# Altium PCB LoRa.PcbDoc
Units mm, origin at the board's own origin, x right, y up, seen from the top; angles counter-clockwise.
Board outline 32.01 x 35.01 mm, 2 copper layers (Top Layer, Bottom Layer); 13 components, 28 nets, 67 pads, 15 vias.
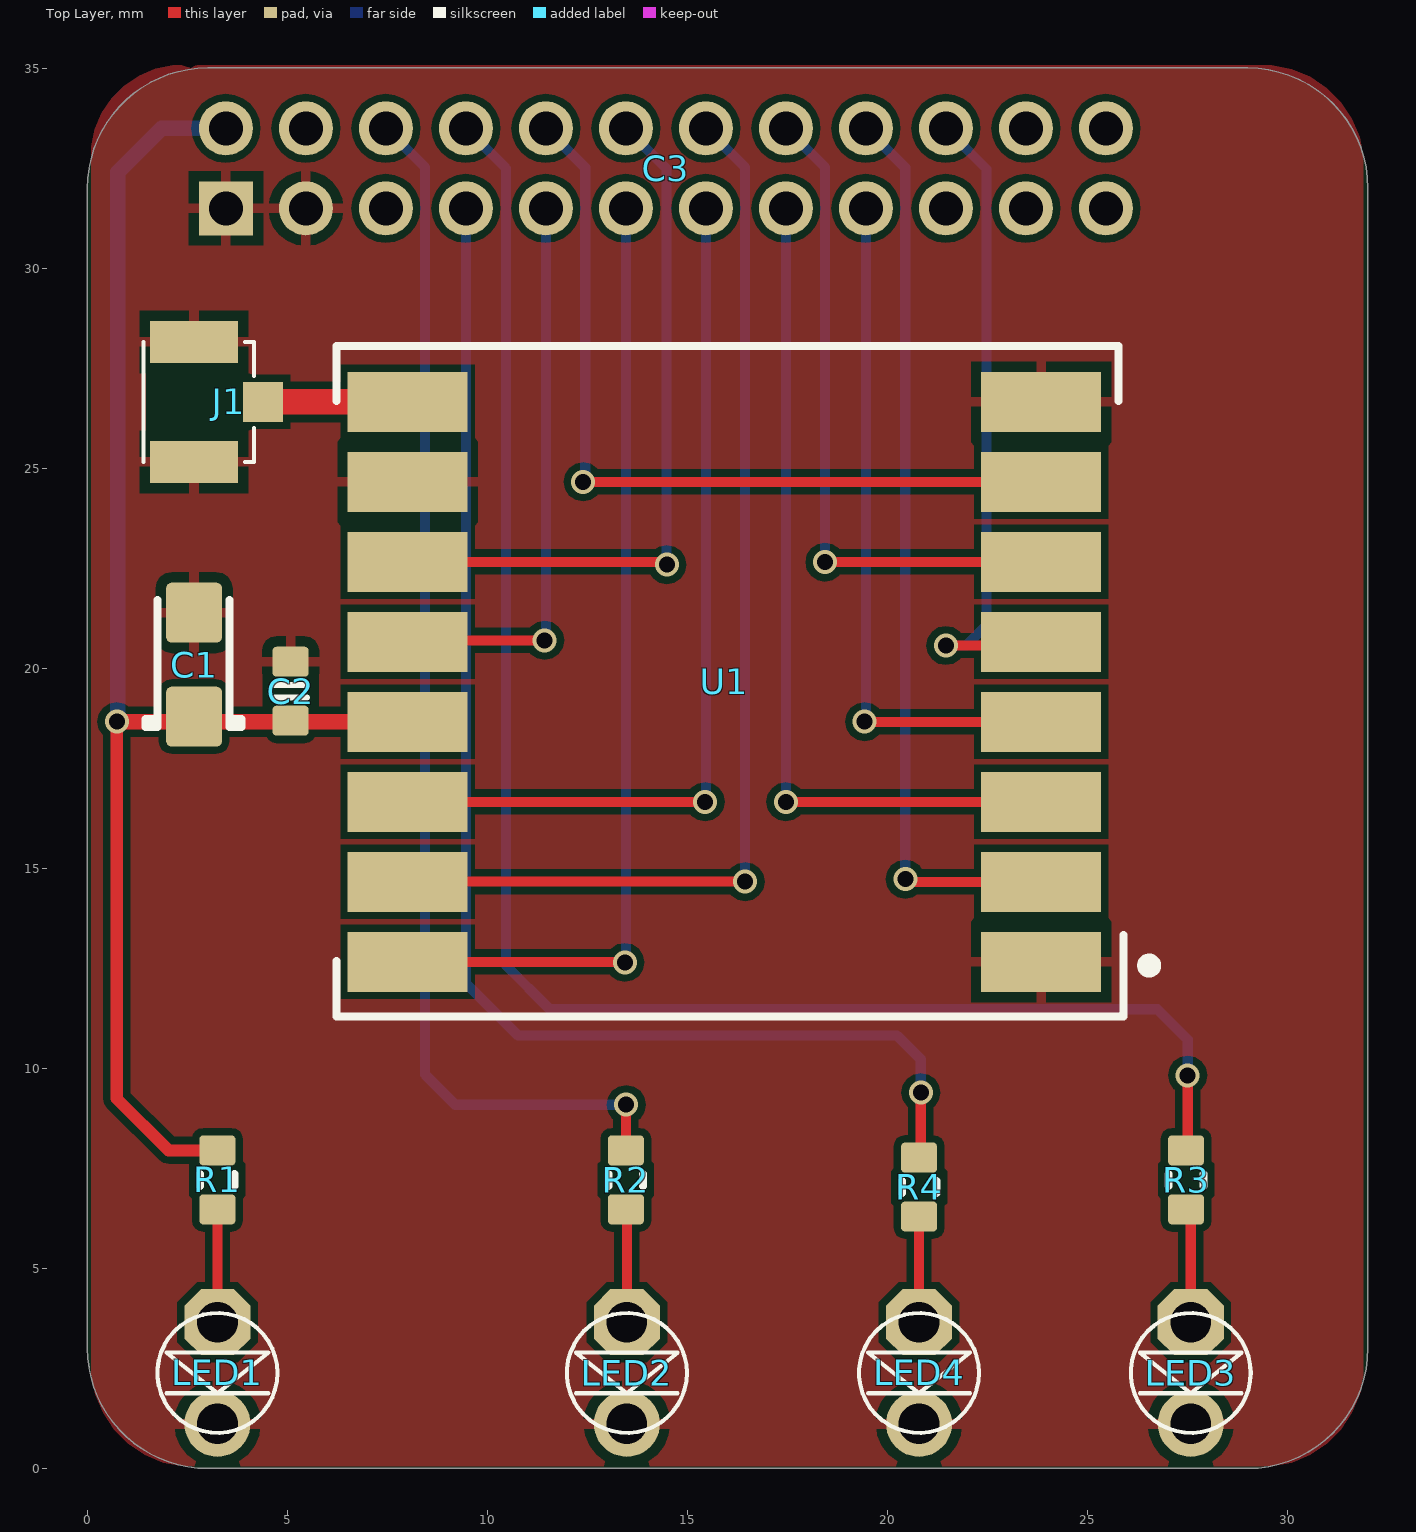
[diagram p0: Top Layer view]
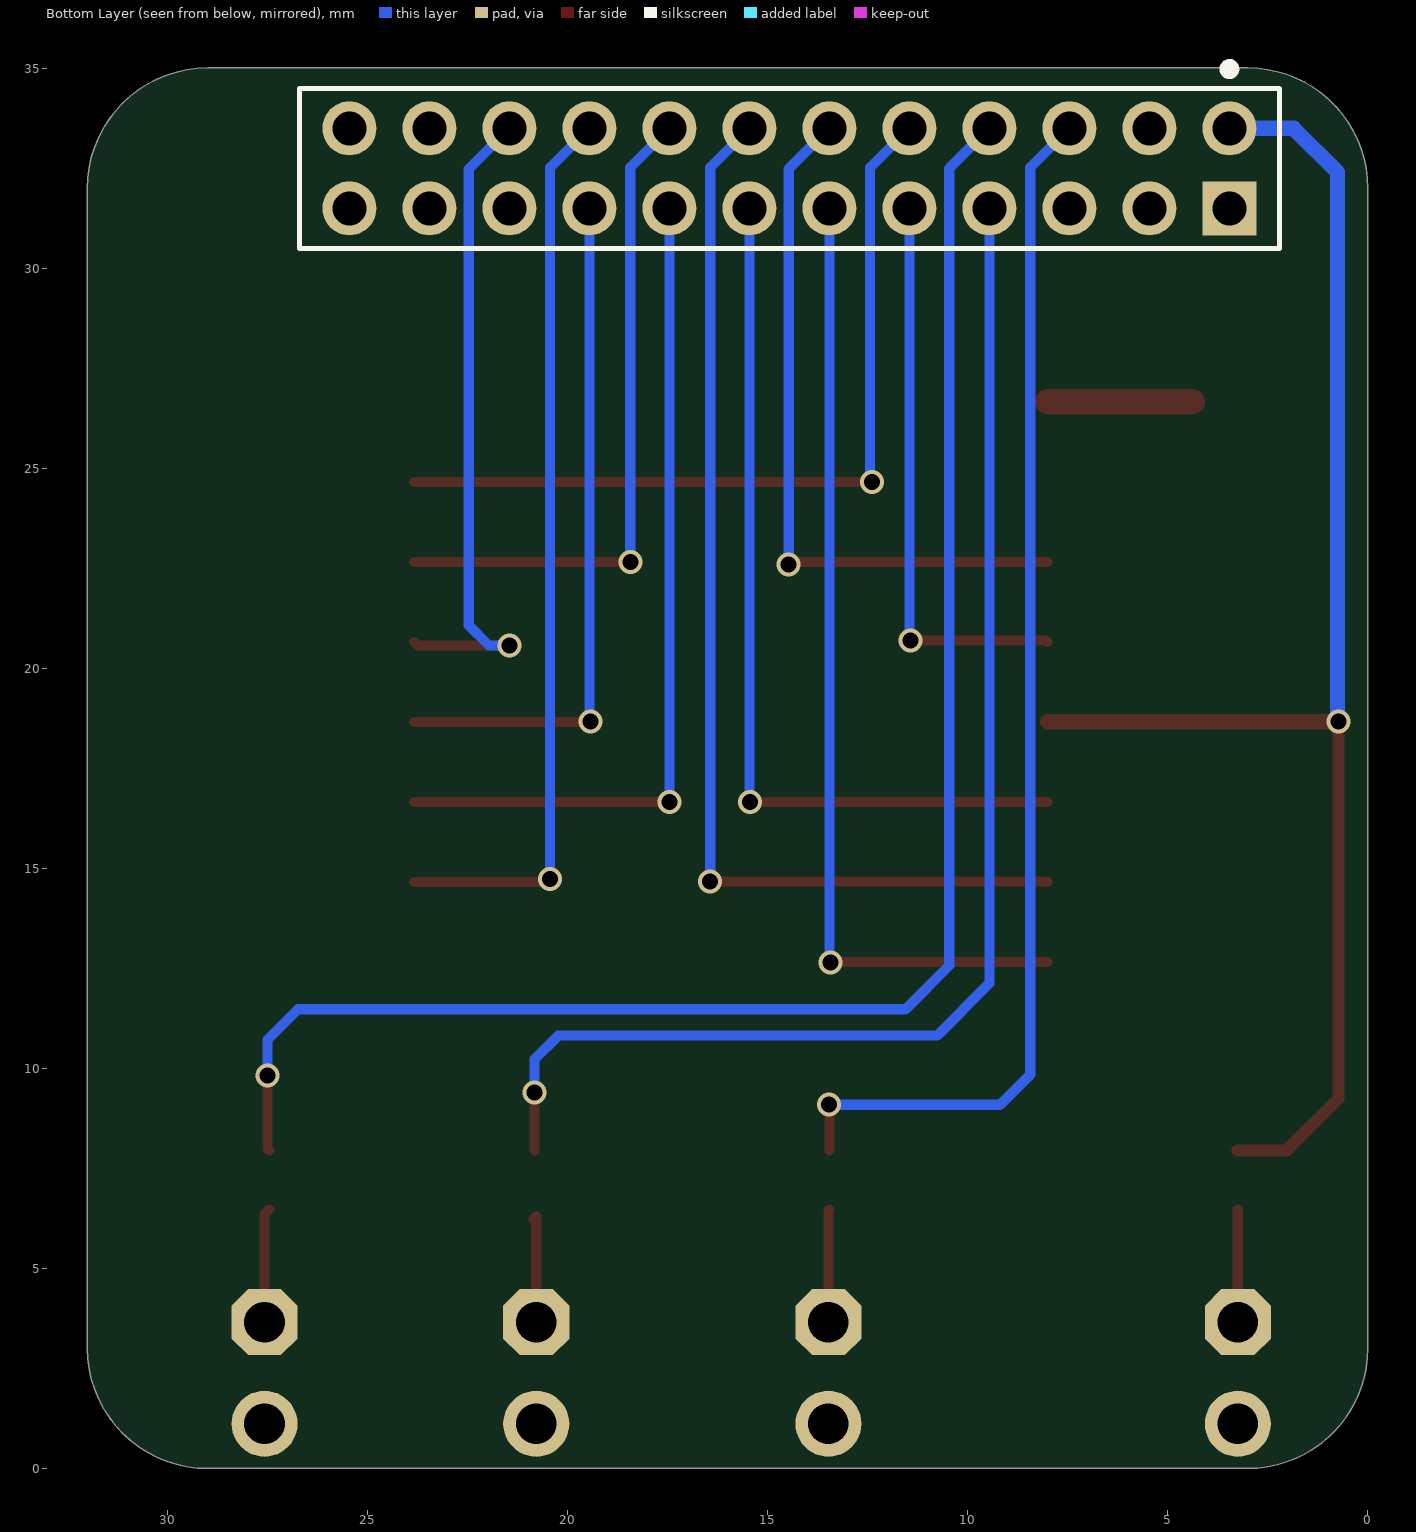
[diagram p1: Bottom Layer view, seen from below]
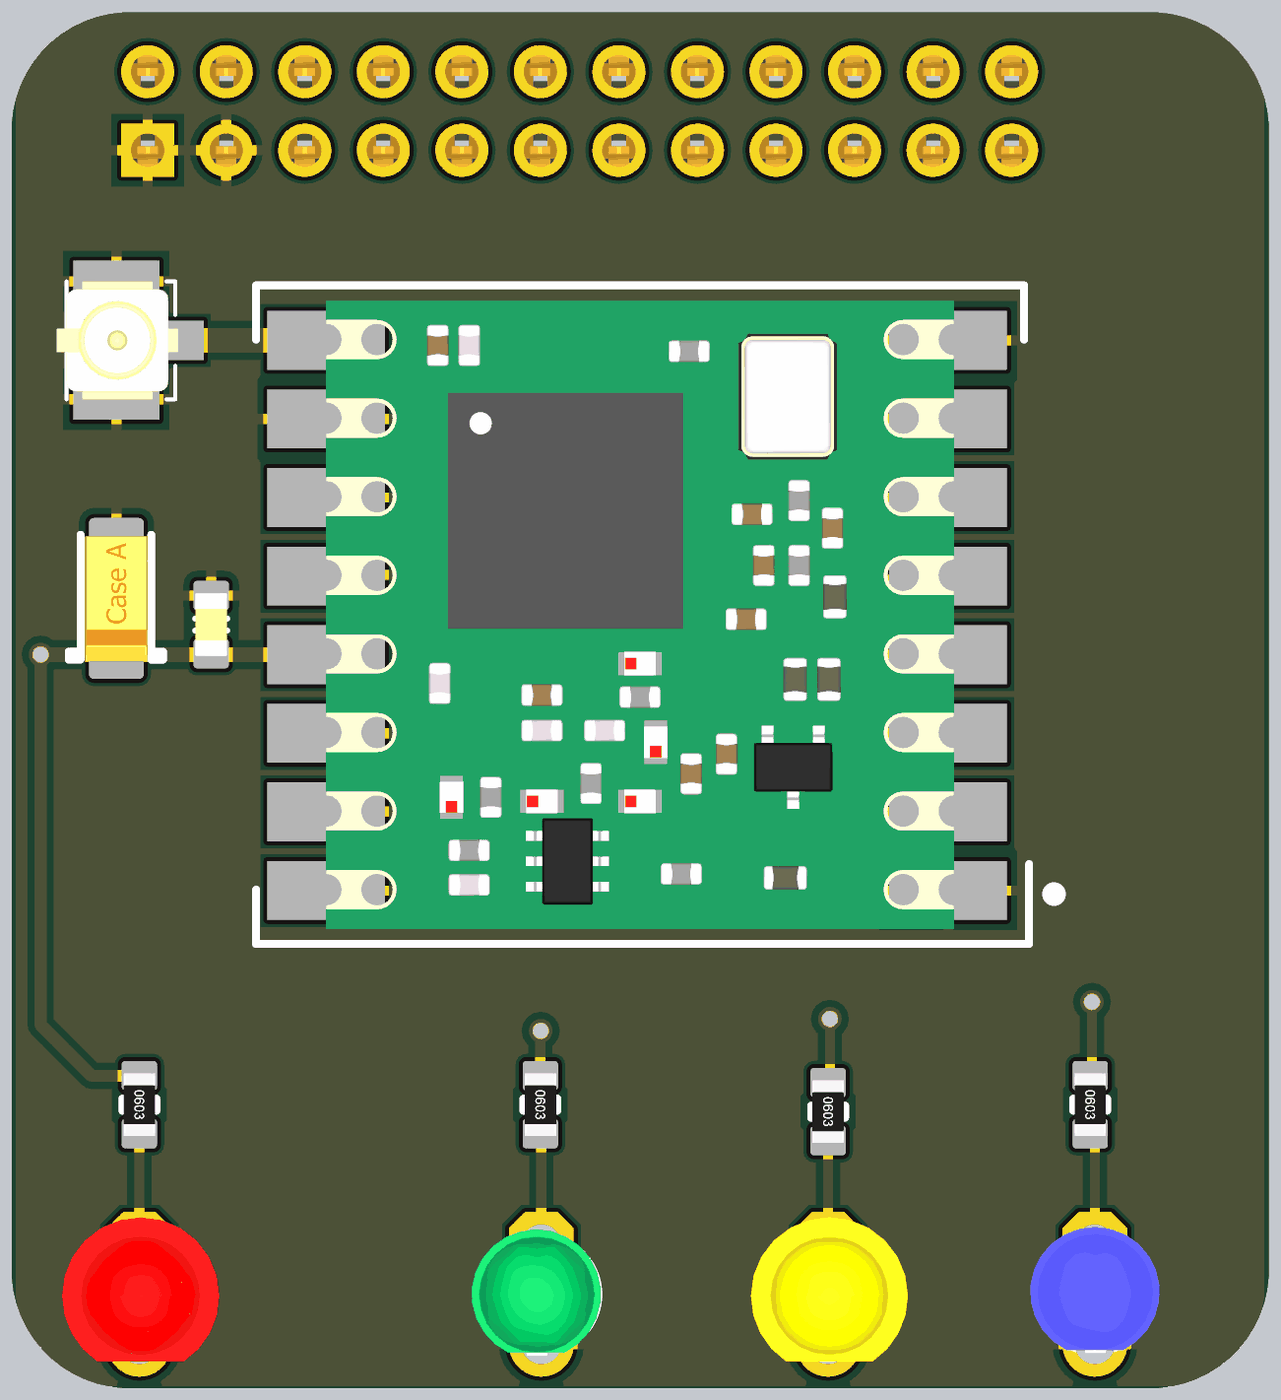
[diagram p2: 3D render of the assembled board from above, using the file's embedded part models]

## Layer stack, top to bottom
Top Solder: solder mask 0.0102, Solder Resist, Dk 3.5
Top Layer: signal copper 0.0356
Dielectric 1: dielectric 0.32, FR-4, Dk 4.8
Bottom Layer: signal copper 0.0356
Bottom Solder: solder mask 0.0102, Solder Resist, Dk 3.5

## Board outline
3.006,0 cw(c3.006,3.006) 0,3.006 0,32.006 cw(c3.006,32.006) 3.006,35.013 29.005,35.013 cw(c29.005,32.005) 32.013,32.006 cw(c32.006,32.005) 32.013,32.005 32.013,3.006 cw(c32.006,3.006) 32.013,3.006 ccw(c29.006,3.006) 32.013,3.006 cw(c29.006,3.006) 29.006,0

## Design rules (kind name [scope] priority, off if disabled: settings)
Clearance [All] p1: gap=0.178 ignorepadtopadclearanceinfootprint=FALSE
PolygonConnect [All] p1: connectstyle=Relief reliefconductorwidth=0.254 reliefentries=4 polygonreliefangle="90 Angle" airgapwidth=0.254
RoutingVias [All] p1: holewidth=0.4 width=0.6 viastyle="Through Hole" minholewidth=0.4 minwidth=0.6 maxholewidth=0.711 maxwidth=1.27
SolderMaskExpansion [All] p1: expansion=0.102
Width [All] p1: maxlimit=1.27 minlimit=0.254 preferedwidth=0.254
30 further rules are at their usual default settings.

## Components (designator, comment, footprint, x,y, rotation, side; value= is the part's Value field where it differs from the comment)
C1 "10uF" "CASE A" 2.667,18.796 r90 top
C2 "0.01uF" C_0603 5.08,19.431 r270 top
C3 "JP12x2-2.0" J12-C2T 14.463,32.504 r0 top
J1 "Anten" ANTEN_IPEX 4.394,26.665 r180 top
LED1 "LED" LED-3MM-RED 3.252,3.658 r270 top value="LED 3 ly Single Colour"
LED2 "LED" LED-3MM-GREEN 13.487,3.658 r270 top value="LED 3 ly Single Colour"
LED3 "LED" LED-3MM-BLUE 27.584,2.261 r270 top value="LED 3 ly Single Colour"
LED4 "LED" LED-3MM-YELLOW 20.791,3.658 r270 top value="LED 3 ly Single Colour"
R1 "4.7k" R_0603 3.252,7.214 r270 top
R2 "4.7k" R_0603 13.463,7.214 r270 top
R3 "4.7k" R_0603 27.466,7.214 r270 top
R4 "4.7k" R_0603 20.791,7.036 r270 top
U1 "RFM95" RFM95 16.002,19.685 r90 top

## Footprints (in the part's own frame and the unit in brackets; to place one, negate y for a bottom-side part, rotate by r counter-clockwise, add the part's x,y. Pads: shape width x height; smd on the part's side, far side on the other; paste and mask are expansions set on the pad)
ANTEN_IPEX [mm]
  rect 1x1 smd: 1(0,0)
  rect 2.2x1.05 smd: 2(1.727,1.5) 2(1.727,-1.5)
  Top Layer pour cut-out: 0.635,0.762 0.635,-0.762 2.921,-0.762 2.921,0.762
  silkscreen extent 0.23,-1.5 3,1.5, body extent 0.15,-1.5 3.25,1.5, height 1.25
C_0603 [mm]
  rrect25% 0.75x0.9 smd: 1(-0.737,0) 2(0.737,0)
  Top Layer pour cut-out: -0.6,0.5 -0.4,0.7 0.4,0.7 0.6,0.5 0.6,-0.5 0.4,-0.7 -0.4,-0.7 -0.6,-0.5
  silkscreen extent -0.15,-0.41 0.15,0.41, body extent -0.8,-0.41 0.8,0.41, height 0.81
"CASE A" [mm]
  rrect20% 1.5x1.4 smd: A(0,0) K(2.6,0)
  silkscreen extent -0.26,-1.19 2.92,1.21, body extent -0.3,-0.8 2.9,0.8, height 1.6
J12-C2T [mm] "24 pins, dual row, straight, gold plating"
  rect 1.35x1.35 hole 0.85: 1(-11,-1)
  round 1.35 hole 0.85: 2(-9,-1) 3(-7,-1) 4(-5,-1) 5(-3,-1) 6(-1,-1) 7(1,-1) 8(3,-1) 9(5,-1) 10(7,-1) 11(9,-1) 12(11,-1) 13(11,1) 14(9,1) 15(7,1) 16(5,1) 17(3,1) 18(1,1) 19(-1,1) 20(-3,1) 21(-5,1) 22(-7,1) 23(-9,1) 24(-11,1)
  body extent -12.25,-2 12.25,2, height 4.31
LED-3MM-BLUE [mil]
  oct 65x65 hole 40: 1(-55,0)
  round 65 hole 40: 2(45,0)
  silkscreen extent -64,-59 54,59, body extent -72,-65 54,65, height 184
LED-3MM-GREEN [mil]
  oct 65x65 hole 40: 1(0,0)
  round 65 hole 40: 2(100,0)
  silkscreen extent -9,-59 109,59, body extent -15,-70 112,60, height 182
LED-3MM-RED [mil]
  oct 65x65 hole 40: 1(0,0)
  round 65 hole 40: 2(100,0)
  silkscreen extent -9,-59 109,59, body extent -27,-77 117,80, height 181
LED-3MM-YELLOW [mil]
  oct 65x65 hole 40: 1(0,0)
  round 65 hole 40: 2(100,0)
  silkscreen extent -9,-59 109,59, body extent -27,-77 117,80, height 181
R_0603 [mm]
  round 0.254 on Mech15: 0(0,0)
  rrect25% 0.75x0.9 smd: 1(-0.737,0) 2(0.737,0)
  Top Layer pour cut-out: -0.6,0.5 -0.4,0.7 0.4,0.7 0.6,0.5 0.6,-0.5 0.4,-0.7 -0.4,-0.7 -0.6,-0.5
  silkscreen extent -0.15,-0.43 0.15,0.43, body extent -0.8,-0.4 0.8,0.4, height 0.46
RFM95 [mm]
  rect 1.5x3 smd: 1(-7.02,-7.844) 2(-5.02,-7.844) 3(-3.02,-7.844) 4(-1.02,-7.844) 5(0.98,-7.844) 6(2.98,-7.844) 7(4.98,-7.844) 8(6.98,-7.844) 9(6.98,7.994) 10(4.98,7.994) 11(2.98,7.994) 12(0.98,7.994) 13(-1.02,7.994) 14(-3.02,7.994) 15(-5.02,7.994) 16(-7.02,7.994)
  silkscreen extent -8.38,-10.69 8.38,9.78, body extent -8,-8 8,8, height 2.04

## Part data
C1: "CAP TANT 10UF 16V 10% 2917", Case="A CASE", Manufacturer=KEMET, Manufacturer1 Example=MDBK, Manufacturer Part Number=T491A106K010AT, Tolerance=20%, Voltage=10VDC, ComponentHeigh=https://www.mouser.vn, Component Type=Standard, ID=3, Mounted=Yes, Part Description="CAP TANT 10UF 10V 10% 1206", Part Number=T491A106K010AT, Pin Count=2, SMD=Yes, Socket=No, Status="Not Recommended"
C2: library part CAP_0603
C3: "WR-PHD 2.00 mm Dual Pin Header", Manufacturer="Würth Elektronik eiSos GmbH", partNo=62002421121, ComponentLink1 Description=Manufacturer, ComponentLink1URL=http://www.we-online.com, ComponentLink2 Description=Datasheet, ComponentLink2URL=http://katalog.we-online.de/em/datasheet/6200xx21121.pdf, Created by="Karrer Zheng", Created Date="2 April 2013", NoPins=24, System=Connector
J1: library part ANTEN_IPEX, "CONN UMC RCPT STR 50 OHM SMD", Case/Package=SMD/SMT, Housing Color=White, Manufacturer=Taoglas, Manufacturer Part Number=RECE.20279.001E.01, Package Quantity=1, Supplier Part Number 1=931-1107-6-ND, Body Material=Brass, Body Plating=Gold, Connector Type="Coaxial,Male Pin", Contact Material=Brass, Contact Plating=Gold, Fastening Type=Snap, Gender=Male, Mount="Surface Mount", Orientation=Straight, Packaging="Tape and Reel", Pricing 1="1=0.75 (USD)", Stock 1=45630, Supplier 1=Digi-Key, Termination=Solder
LED1 LED2 LED3 LED4: "LED Single colour Green and Red"
R1 R2 R3 R4: library part RES_0603
U1: "RFM95 ULTRA-LONG RANGE TRANSCEIV", Manufacturer="Seeed Studio", Manufacturer Part Number=109990166, Supplier Part Number 1=1597-1488-ND, Pricing 1="1=7.09 (USD)", Stock 1=0, Supplier 1=Digi-Key

## Via types
v1: diameter 0.6, hole 0.4, Top Layer to Bottom Layer, tented both sides, 15 vias

## Nets (pads, with @x,y where several pads share a name; then routed paths per layer and width w, separated by ;. In a path a pad name is that pad's centre, name@x,y a point inside that pad or via, vN(x,y) a via of type N, cw(c..) or ccw(c..) an arc to the next point about the centre after c; other vN are vias at no path point)
3V3: C1.A C2.2 C3.24 R1.1 U1.13 | length 36.6
  Top Layer w0.305: v1(0.737,18.669) 0.737,9.246 2.032,7.951 R1.1
  Top Layer w0.381: v1(0.737,18.669) 0.74,18.665 U1.13
  Bottom Layer w0.381: v1@0.762,18.669 0.762,32.41 1.856,33.504 C3.24
GND: C1.K C2.1 C3.1 C3.2 J1.2 LED1.2 LED2.2 LED3.2 LED4.2 U1.1 U1.8 U1.10
NetC3_3: C3.3
NetC3_4: C3.4 R4.1 | length 33.8
  Top Layer w0.254: R4.1@20.835,7.951 v1(20.835,9.398)
  Bottom Layer w0.254: C3.4 9.463,12.127 10.77,10.82 20.244,10.82 20.835,10.229 v1(20.835,9.398)
NetC3_5: C3.5 U1.12 | length 14.3
  Top Layer w0.254: U1.12 8.044,20.701 v1(11.43,20.701)
  Bottom Layer w0.254: v1(11.43,20.701) 11.463,20.734 C3.5
NetC3_6: C3.6 U1.16 | length 24.2
  Top Layer w0.254: U1.16 13.421,12.665 v1(13.437,12.649)
  Bottom Layer w0.254: v1@13.463,12.701 C3.6
NetC3_7: C3.7 U1.14 | length 22.3
  Top Layer w0.254: U1.14 15.44,16.665 v1(15.443,16.668)
  Bottom Layer w0.254: v1@15.463,16.668 C3.7
NetC3_8: C3.8 U1.3 | length 21.2
  Top Layer w0.254: v1(17.463,16.665) U1.3
  Bottom Layer w0.254: v1(17.463,16.665) C3.8
NetC3_9: C3.9 U1.4 | length 17.3
  Top Layer w0.254: v1(19.431,18.669) 19.435,18.665 U1.4
  Bottom Layer w0.254: v1@19.463,18.669 C3.9
NetC3_10: C3.10
NetC3_11: C3.11
NetC3_12: C3.12
NetC3_13: C3.13
NetC3_14: C3.14
NetC3_15: C3.15 U1.5 | length 16.5
  Top Layer w0.254: v1(21.463,20.574) 23.755,20.574 U1.5
  Bottom Layer w0.254: v1(21.463,20.574) 21.971,20.574 22.479,21.082 22.479,32.488 C3.15
NetC3_16: C3.16 U1.2 | length 22.6
  Top Layer w0.254: v1(20.447,14.732) 20.514,14.665 U1.2
  Bottom Layer w0.254: C3.16 20.447,32.52 v1(20.447,14.732)
NetC3_17: C3.17 U1.6 | length 16.7
  Top Layer w0.254: v1(18.44,22.657) 18.449,22.665 U1.6
  Bottom Layer w0.254: C3.17 18.443,32.524 18.443,23.19 18.44,23.188 v1(18.44,22.657)
NetC3_18: C3.18 U1.15 | length 27.7
  Top Layer w0.254: U1.15 8.015,14.672 v1(16.443,14.672)
  Bottom Layer w0.254: C3.18 16.443,32.524 v1(16.443,14.672)
NetC3_19: C3.19 U1.11 | length 17.7
  Top Layer w0.254: U1.11 14.486,22.665 v1(14.486,22.598)
  Bottom Layer w0.254: C3.19 14.478,32.489 v1@14.478,22.733
NetC3_20: C3.20 U1.7 | length 20.7
  Top Layer w0.254: v1(12.395,24.663) 12.397,24.665 U1.7
  Bottom Layer w0.254: C3.20 12.446,32.521 v1@12.446,24.663
NetC3_21: C3.21 R3.1 | length 41.9
  Top Layer w0.254: R3.1 27.508,7.993 v1(27.508,9.83)
  Bottom Layer w0.254: C3.21 10.465,32.502 10.465,12.573 11.557,11.481 26.746,11.481 27.508,10.719 v1(27.508,9.83)
NetC3_22: C3.22 R2.1 | length 30.6
  Top Layer w0.254: R2.1 13.463,9.093 v1(13.471,9.093)
  Bottom Layer w0.254: C3.22 8.443,32.524 8.443,9.845 9.195,9.093 v1(13.471,9.093)
NetC3_23: C3.23
NetJ1_1: J1.1 U1.9 | length 3.6
  Top Layer w0.635: J1.1 U1.9
NetLED1_1: LED1.1 R1.2 | length 2.8
  Top Layer w0.254: LED1.1 R1.2
NetLED2_1: LED2.1 R2.2 | length 2.8
  Top Layer w0.254: R2.2 13.487,6.453 LED2.1
NetLED3_1: LED3.1 R3.2 | length 2.9
  Top Layer w0.254: R3.2 27.584,6.359 LED3.1
NetLED4_1: LED4.1 R4.2 | length 2.7
  Top Layer w0.254: LED4.1 R4.2 R4.2@20.858,6.233
pads on no net: R1.0 R2.0 R3.0 R4.0

## Polygon pours and split planes (outlines as drawn)
GND on Top Layer "Top Layer-GND" (solid, pour order 0): 2.591,35.001 cw(c2.775,34.817) 2.775,35.077 29.362,35.077 cw(c29.362,32.537) 31.902,32.537 31.902,2.591 cw(c29.362,2.591) 29.362,0.051 2.642,0.051 cw(c2.642,2.591) 0.102,2.591 0.102,32.817 cw(c2.362,32.817) 2.362,35.077

## Silkscreen, mask and mechanical layers (free items; w line width, h text height)
Mechanical 1:
  lines w0.013: 27.005,35.006 3.006,35.006 ; 27.006,0.006 3.006,0.006 ; 0.006,3.006 ccw(c3.006,3.006) 3.006,0.006 ; 0.006,3.006 ccw(c3.006,3.006) 3.006,0.006 ; 0.006,3.006 0.006,32.006 ; 0.006,3.006 0.006,32.006 ; 0.006,32.006 cw(c3.006,32.006) 3.006,35.006 ; 0.006,32.006 cw(c3.006,32.006) 3.006,35.006 ; 3.006,0.006 29.006,0.006 ccw(c29.006,3.006) 32.006,3.006 32.006,32.005 ccw(c29.005,32.005) 29.005,35.006 3.006,35.006